# EAGLE board ESP8266-12e-gopro-mavlink_RGB (EAGLE 7.3.0)
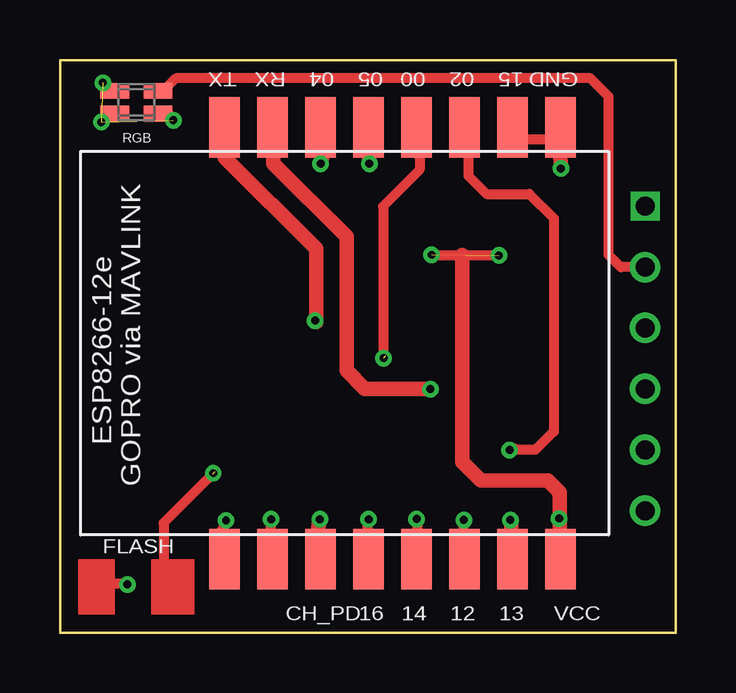
[diagram p0: board, top side]
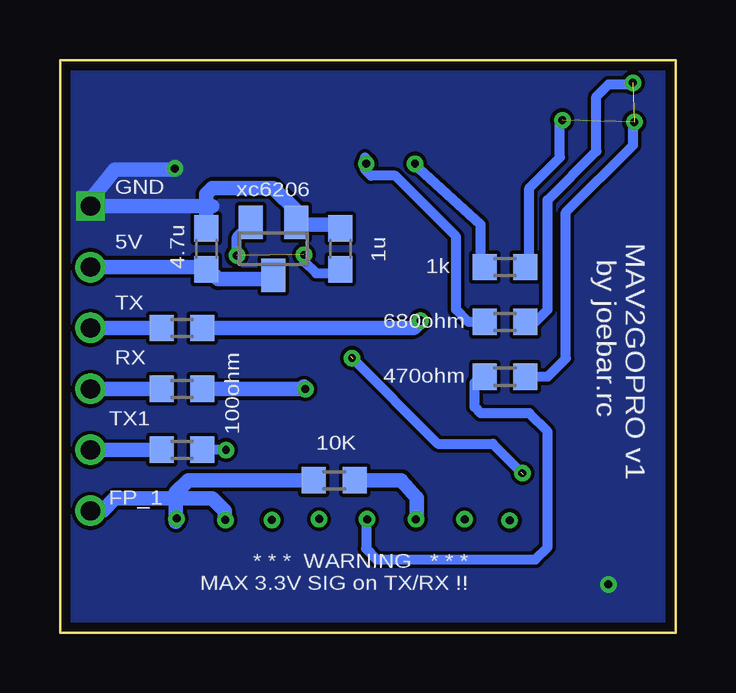
[diagram p1: board, bottom side, seen from below]

Size 25.65 x 23.88 mm. Coordinates in mm from the lower left corner, seen from the top.
Outline: 25.65,0 0,0 0,23.88 25.65,23.88 25.65,0
Copper layers (1*16): Top 0.0356mm / dielectric 1.5011mm / Bottom 0.0356mm
Design rules "oshpark-2layer *": minimum track width 6mil, minimum drill 13mil, track to track 6mil, track to pad 6mil, pad to pad 6mil, via to via 6mil, smd to smd 6mil, copper to edge 15mil, drill to drill 6mil, minimum pad ring 7mil, minimum via ring 7mil, stop-mask expansion 3mil, vias tented up to drill 13mil, thermal gap 10mil

## Footprints (pad centres in the part's own frame; a part is rotated, then mirrored left to right if it is on the bottom)
ESP-07/12 = smd 2.54 x 1.27: ADC -1,14; CH_PD -1,12; GND 17,2; GPIO0 17,8; GPIO2 17,6; GPIO4 17,12; GPIO5 17,10; GPIO12 -1,6; GPIO13 -1,4; GPIO14 -1,8; GPIO15 17,4; GPIO16 -1,10; REST -1,16; RXD 17,14; TXD 17,16; VCC -1,2
GM1WA55311A = smd 0.65 x 1.2: 1 -0.475,0.9; 2 -0.475,-0.9; 3 0.475,-0.9; 4 0.475,0.9
R0603 = smd 1 x 1.1: 1 -0.85,0; 2 0.85,0
C0603 = smd 1.1 x 1: 1 -0.85,0; 2 0.85,0
SOT23 = smd 1 x 1.4: 1 -0.95,-1.1; 2 0.95,-1.1; 3 0,1.1

## Placement (x,y rotation side)
E$8  [ESP-07/12]  22.86,4.06 90 top
E$12  [GM1WA55311A]  3.18,22.11 270 top
E$13  [R0603]  20.57,12.7 0 bottom
E$14  [R0603]  20.57,10.16 0 bottom
E$15  [R0603]  20.57,7.62 0 bottom
E$16  [R0603]  14.22,6.35 0 bottom
E$17  [R0603]  7.11,15.24 0 bottom
E$18  [R0603]  7.11,12.95 0 bottom
E$19  [R0603]  7.11,10.67 0 bottom
E$20  [C0603]  13.97,16 270 bottom
E$21  [C0603]  19.56,16 270 bottom
XC1  [SOT23]  16.76,16 180 bottom

## Library data of the parts
E$8 = ESP-07_12
E$12 = led
E$13-E$19 = resistor_menno_top
E$20 E$21 = eagle-ltspice
XC1 = v-reg

## Tracks (layer width: path | path; a pad name or v marks a point on that pad's centre or on a via)
GND1  (via drill 0.33, 0.8)
  Bottom 0.61: 20.83,19.3 23.37,19.3 24.38,18.03 v24.38,17.78 19.3,17.78
  other vias: 2.8,2.01 20.87,19.35
  pour Bottom: 0,23.88 25.65,23.88 25.65,0 0,0
PWM1  (via drill 0.8 pad 1.27)
  Bottom 0.61: v24.38,5.08 23.88,5.08 23.37,5.59 19.3,5.59 18.8,5.08 18.8,4.83
RX_HV1  (via drill 0.8 pad 1.27)
  Bottom 0.61: v24.38,10.16 21.59,10.16
S$1
  Top 0.406: 4.83,21.34 4.57,21.59
S$2
  Top 0.406: 1.78,21.34 2.03,21.59
S$3
  Top 0.406: 1.78,22.86 2.03,22.61
S$4
  Top 0.406: 8.79,4.65 8.69,3.85
S$5
  Top 0.406: 6.99,4.65 6.59,4.05
S$6
  Top 0.406: 14.89,4.71 14.89,3.95
S$7  (via drill 0.33)  (2 unrouted)
  other vias: 4.72,21.36 4.72,21.36 1.72,21.29 1.79,22.93
S$8
  Top 0.406: 12.79,4.75 12.79,3.55
S$9
  Top 0.406: 16.79,4.71 16.79,3.75
S$10
  Top 0.406: 18.99,7.65 18.79,7.65 18.69,7.55
S$11
  Top 0.406: 2.79,2.03 2.03,2.03
S$15  (via drill 0.33)
  other vias: 8.8,4.72
S$19
  Top 0.406: 18.8,20.57 21.08,20.57
S$20
  Bottom 0.61: 10.79,4.75 10.79,5.61 11.43,6.35 13.21,6.35
S$21
  Bottom 0.61: 15.24,6.35 20.32,6.35 20.83,5.84 20.83,4.62 20.79,4.75
S$22
  Bottom 0.406: 6.1,15.24 6.1,18.54 4.83,19.81 4.83,21.32 4.79,21.35
S$23
  Bottom 0.406: 6.35,12.95 5.84,12.95 5.33,13.46 5.33,18.03 3.3,20.07 3.3,22.35 2.79,22.86 1.78,22.86
S$24
  Bottom 0.406: 6.1,10.67 5.33,10.67 4.57,11.43 4.57,17.53 1.78,20.32 1.78,21.17 1.69,21.25
S$25
  Bottom 0.406: 8.13,15.24 8.13,17.02 10.92,19.56
S$26
  Bottom 0.406: 8.13,12.95 8.64,12.95 9.14,13.46 9.14,16.51 11.68,19.05 12.7,19.05 12.95,19.3 12.95,19.81
S$27
  Bottom 0.406: 12.9,4.72 12.9,3.5 12.45,3.05 5.84,3.05 5.33,3.56 5.33,8.38 6.1,9.14 8.13,9.14 8.38,9.4 8.38,10.41 8.13,10.67
S$28
  Bottom 0.406: 15.49,15.75 15.49,15.49 14.99,14.99 13.97,14.99
S$29
  Bottom 0.61: 13.97,17.02 15.49,17.02 15.75,17.27 15.75,17.53 16.76,18.54 19.3,18.54 19.56,18.29 19.56,17.02
S$30
  Bottom 0.406: 18.29,15.75 18.29,16.51 17.78,17.02
S$31
  Top 0.61: 8.89,20.57 8.89,19.56 11.94,16.51 11.94,10.92 12.7,10.16 15.24,10.16
S$32
  Top 0.61: 6.86,20.57 6.86,19.81 10.67,16 10.67,12.95
S$33
  Bottom 0.61: 19.81,12.7 10.92,12.7 10.67,12.95
S$34
  Bottom 0.61: 19.56,10.16 15.59,10.16 15.49,10.25
S$35
  Top 0.406: 17.02,20.32 17.02,19.05 17.78,18.29 19.56,18.29 20.57,17.27 20.57,8.38 19.81,7.62 19.05,7.62
S$36
  Bottom 0.406: 18.8,7.62 19.81,7.62
S$37  (2 unrouted)
  Top 0.406: 14.99,19.81 14.99,19.3 13.46,17.78 13.46,11.43 | 6.45,6.7 4.32,4.57 4.32,2.03
  Bottom 0.406: 13.56,11.53 9.91,7.87 7.62,7.87 6.35,6.6
S$39  (via drill 0.33)
  other vias: 10.63,13.01
S$40
  Top 0.61: 18.8,4.72 18.8,3.81
S$41  (via drill 0.33)  (1 unrouted)
  other vias: 18.29,15.73 15.49,15.75
S$42  (via drill 0.33)
  other vias: 12.89,19.55
S$46  (via drill 0.33)
  other vias: 10.86,19.55
S$47  (via drill 0.33)
  other vias: 18.74,7.61
S$48  (via drill 0.33)
  other vias: 15.43,10.15
S$50  (via drill 0.33)
  other vias: 20.8,4.76
S$51  (via drill 0.33)
  other vias: 18.76,4.7
S$52  (via drill 0.33)
  other vias: 16.83,4.7
S$53  (via drill 0.33)
  other vias: 14.86,4.73
S$54  (via drill 0.33)
  other vias: 12.86,4.72
S$55  (via drill 0.33)
  other vias: 10.83,4.72
S$56  (via drill 0.33)
  other vias: 6.92,4.68
S$57  (via drill 0.33)
  other vias: 6.39,6.65
S$58  (via drill 0.33)
  other vias: 13.49,11.45
S$59
  Top 0.61: 10.79,4.65 10.69,3.85 10.79,3.75
S$60
  Top 0.61: 10.92,19.81 10.92,20.08 10.99,20.15
S$61
  Top 0.61: 12.89,19.5 12.89,20.1
S$62
  Top 0.61: 20.89,19.35 20.79,20.35
TX2  (via drill 0.8 pad 1.27)
  Bottom 0.61: v24.38,7.62 21.59,7.62
TX_HV1  (via drill 0.8 pad 1.27)
  Bottom 0.61: v24.38,12.7 21.59,12.7
VIN1  (via drill 0.8 pad 1.27)
  Top 0.406: v24.38,15.24 23.37,15.24 22.86,15.75 22.86,22.35 22.1,23.11 4.83,23.11 4.32,22.61
  Bottom 0.61: 16.76,14.73 19.05,14.73 19.56,15.24 v24.38,15.24
VOUT1
  Top 0.406: 15.49,15.75 16.76,15.75 18.29,15.75
  Top 0.61: 16.76,15.75 16.76,7.11 17.53,6.35 20.32,6.35 20.83,5.84 20.83,3.56
(copper drawn outside any net)
  shapes: Top area x2

## Text on the board
tPlace: TX | RX | 04 | 05 | 00 | 02 | 15 | GND | ESP8266-12e / GOPRO via MAVLINK | FLASH | CH_PD | 16 | 14 | 12 | 13 | VCC
bPlace: GND | MAV2GOPRO v1 / by joebar.rc | 5V | TX | RX | TX1 | FP_1 | * * * WARNING * * * / MAX 3.3V SIG on TX/RX !!
tNames: RGB
bNames: xc6206 | 1u | 4.7u | 1k | 680ohm | 100ohm | 470ohm | 10K